# Altium PCB 6C-4L-1550um.PcbDoc
Units mm, origin at the board's own origin, x right, y up, seen from the top; angles counter-clockwise.
Board outline 54 x 72 mm, 4 copper layers (Top Layer, Mid-Layer 1, Mid-Layer 2, Bottom Layer), stack 1.536 mm thick; 78 components, 58 nets, 276 pads, 193 vias.
Unrouted connection lines stored in the file: 55.
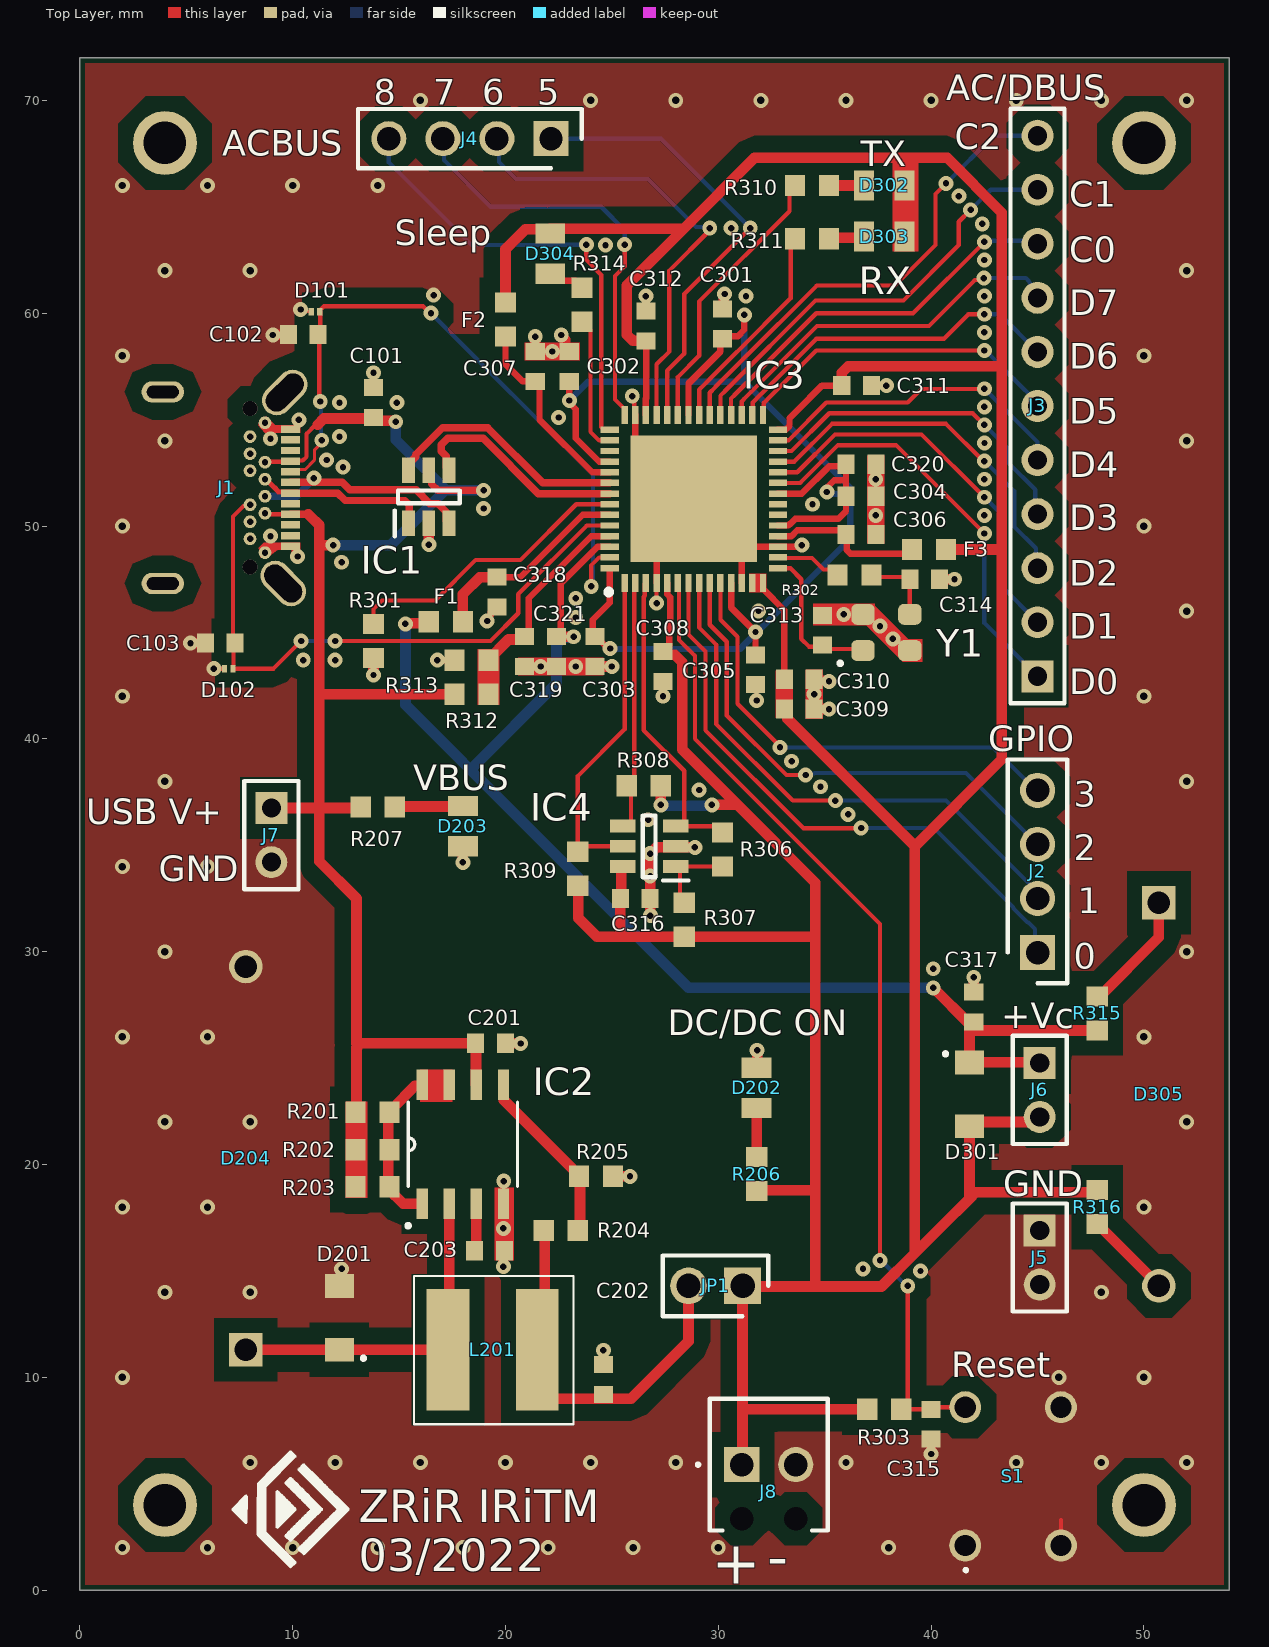
[diagram p0: Top Layer view]
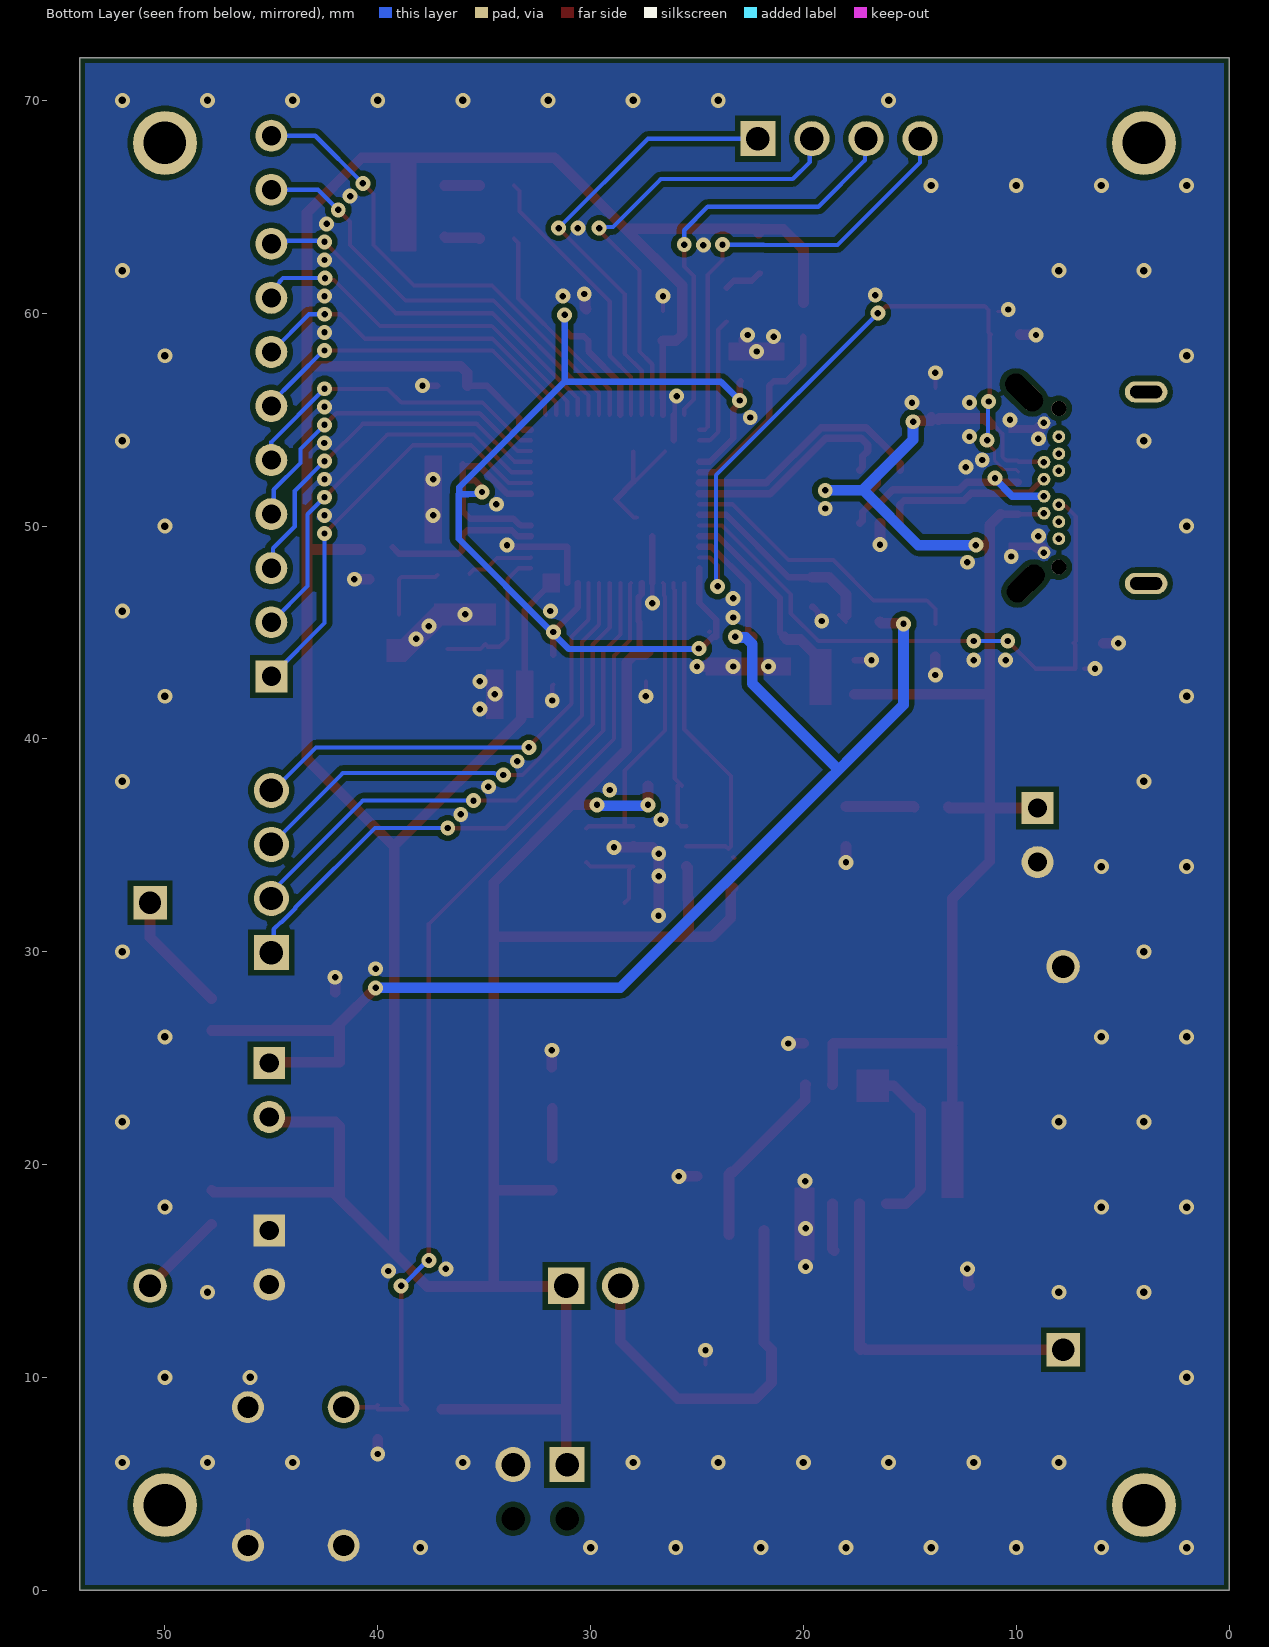
[diagram p1: Bottom Layer view, seen from below]
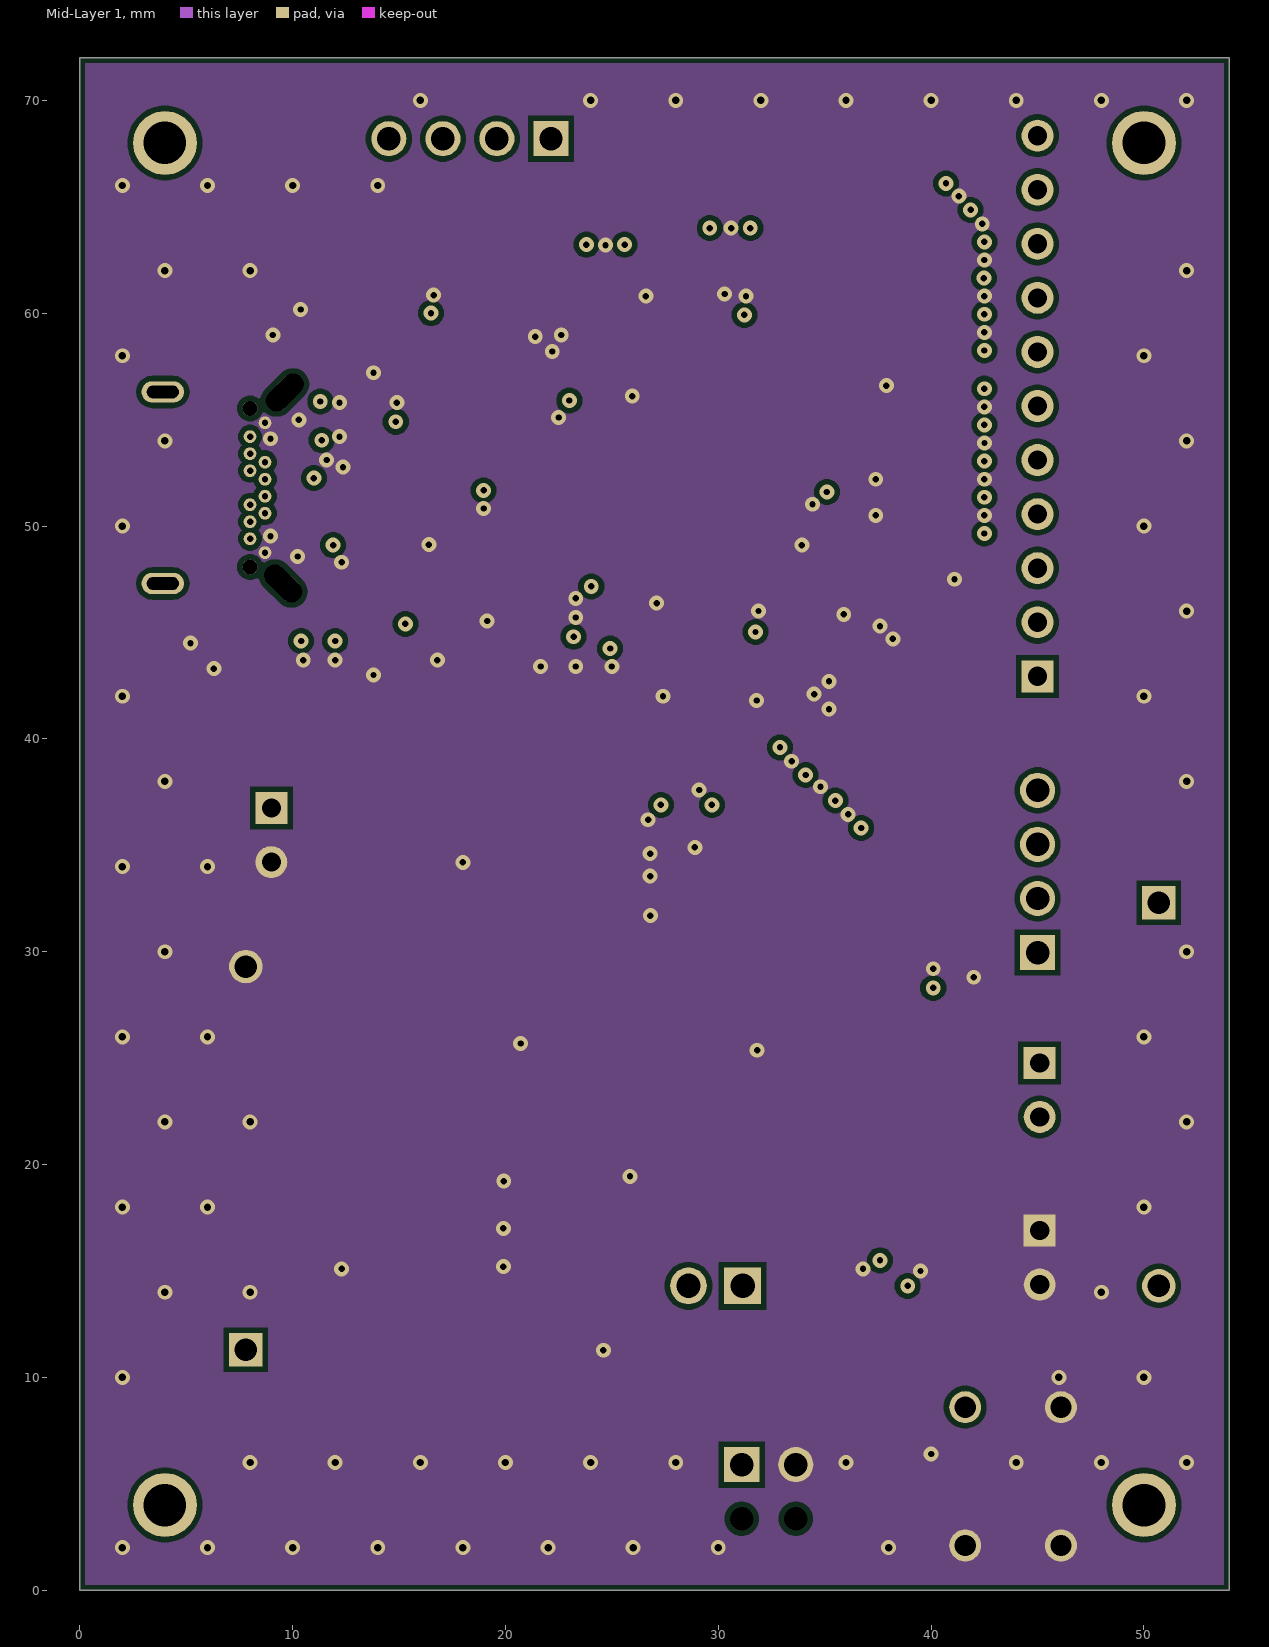
[diagram p2: Mid-Layer 1]
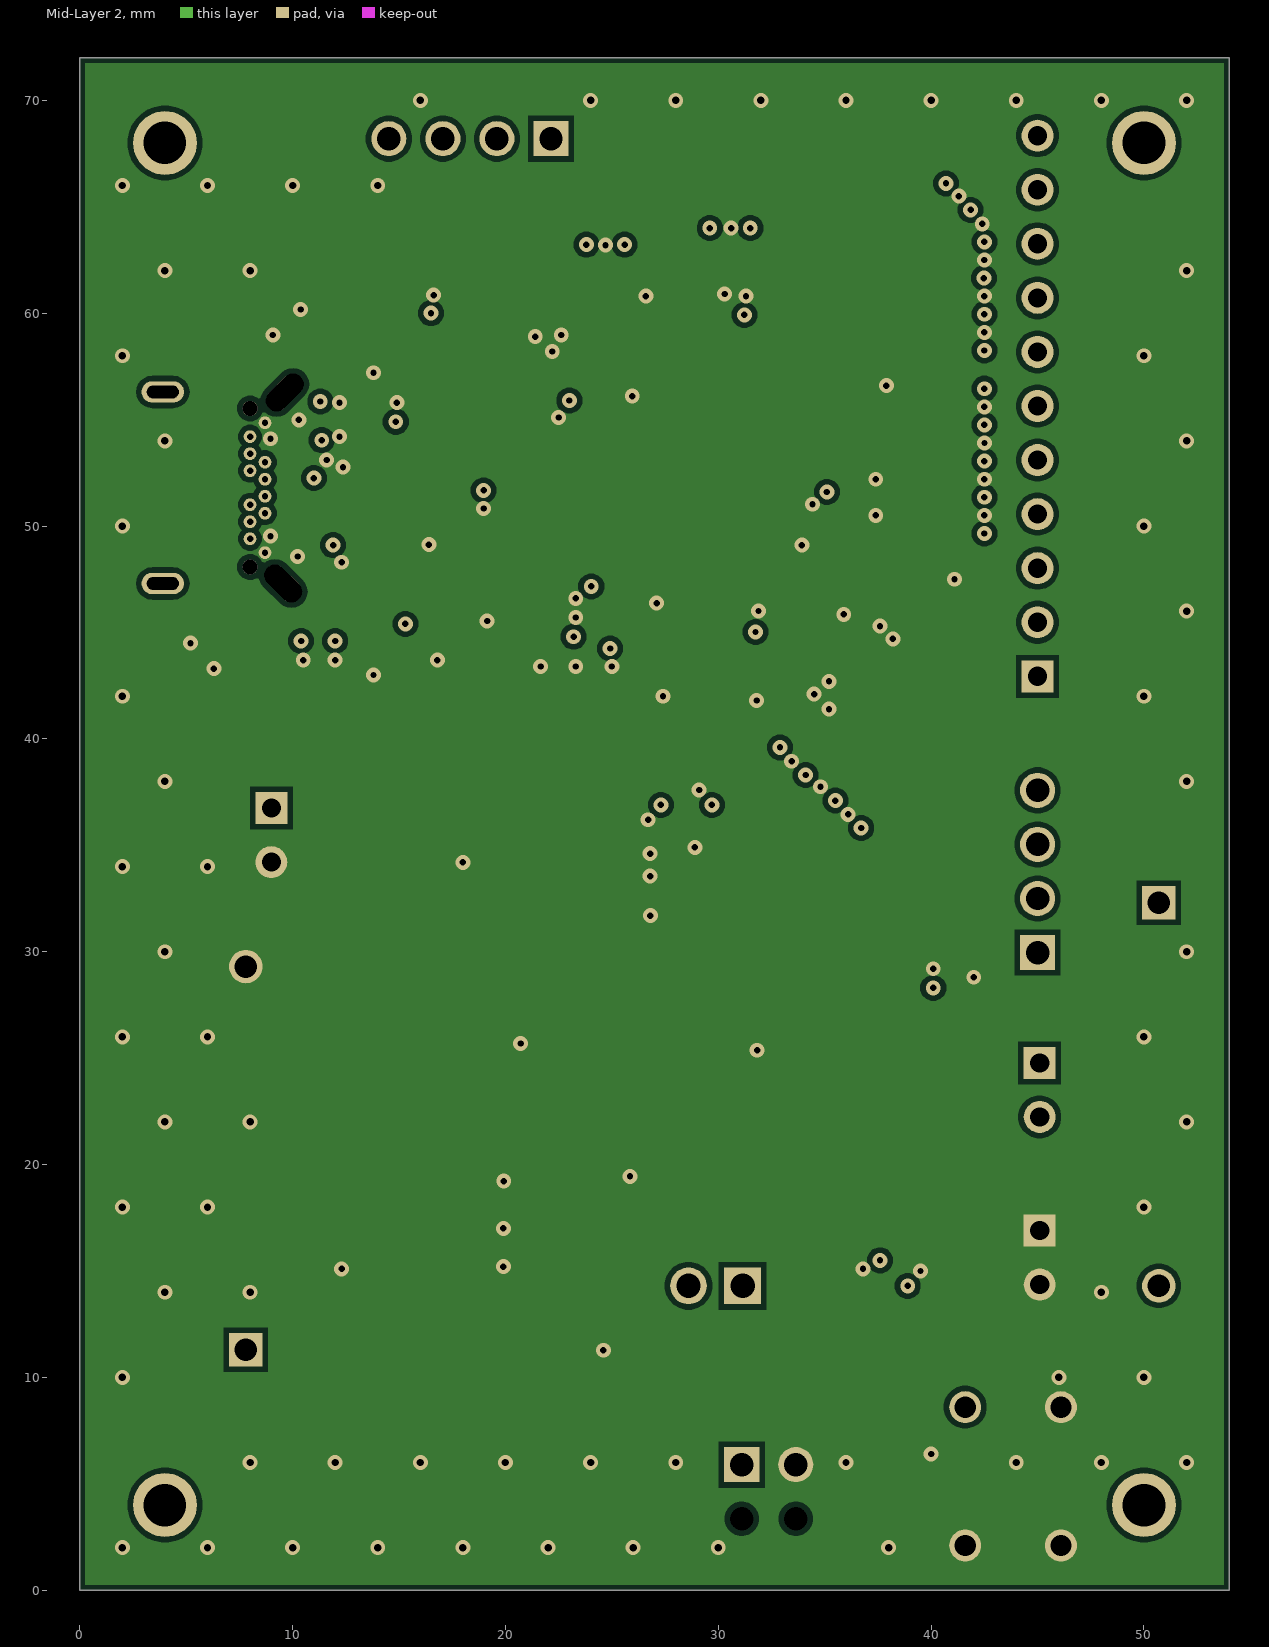
[diagram p3: Mid-Layer 2]

## Layer stack, top to bottom
Top Solder: solder mask 0.0102, Solder Resist, Dk 3.5
Top Layer: signal copper 0.018
Dielectric1: prepreg 0.36, FR-4, Dk 4.8
Mid-Layer 1: signal copper 0.035
Dielectric2: core 0.71, FR-4, Dk 4.8
Mid-Layer 2: signal copper 0.035
Dielectric3: prepreg 0.36, FR-4, Dk 4.8
Bottom Layer: signal copper 0.018
Bottom Solder: solder mask 0.0102, Solder Resist, Dk 3.5

## Board outline
0,0 54,0 54,72 0,72

## Design rules (kind name [scope] priority, off if disabled: settings)
BoardOutlineClearance [All] p1: gap=0.25 ignorepadtopadclearanceinfootprint=FALSE except(0: Arc-SplitContinuation Track-SplitContinuation SMDPad-SplitContinuation THPad-SplitContinuation Via-SplitContinuation Fill-SplitContinuation Poly-SplitContinuation Region-SplitContinuation Text-SplitContinuation)
Clearance Clearance_Poly_top [(InPolygon AND OnLayer('Top Layer'))] p1: gap=0.7 ignorepadtopadclearanceinfootprint=FALSE
Clearance Clearance_Poly [InPolygon] p2: gap=0.25 ignorepadtopadclearanceinfootprint=FALSE
Clearance Clearance-xPP-xTP-xTT [All] p3: gap=0.15 ignorepadtopadclearanceinfootprint=FALSE
ComponentClearance [All] p1: gap=0.25 collisioncheckmode=3 verticalgap=0.25 showdistances=FALSE
DiffPairsRouting [All] p1: maxlimit=0.2 minlimit=0.15 mostfreqgap=0.15 toplayer_minwidth=0.25 toplayer_maxwidth=0.4 toplayer_prefwidth=0.35 midlayer1_maxgap=0.15 midlayer1_minwidth=0.25 midlayer1_maxwidth=0.4 midlayer1_prefwidth=0.35 midlayer2_maxgap=0.15 midlayer2_minwidth=0.25 midlayer2_maxwidth=0.4 midlayer2_prefwidth=0.35 bottomlayer_minwidth=0.25 bottomlayer_maxwidth=0.4 bottomlayer_prefwidth=0.35 maxuncoupledlength=12.5
Height [All] p1: minheight=0 maxheight=25 prefheight=12.5
HoleSize HoleSize-PTH [All] p1: absolutevalues=TRUE maxlimit=2 minlimit=0.25 maxpercent=80.000 minpercent=20.000
HoleToHoleClearance [All] p1: gap=0.35 allowstackedmicrovias=TRUE
MinimumAnnularRing "Minimum IAR  >0.45mm" [((ObjectKind = 'Pad') OR (ObjectKind = 'Via')) And (Layer = 'MultiLayer') And (HoleDiameter > AsMM(0.45))] p1: minimumring=0.175 // minimum inner annular ring for pads > 0.45mm finished hole size
MinimumAnnularRing "Minimum IAR <=0.45mm" [((ObjectKind = 'Pad') OR (ObjectKind = 'Via')) And (Layer = 'MultiLayer') And (HoleDiameter <= AsMM(0.45))] p2: minimumring=0.175 // minimum inner annular ring for pads <= 0.45mm finished hole size
MinimumSolderMaskSliver [All] p1: minsoldermaskwidth=0.08
PlaneClearance PlaneClearance-IPI [All] p1: clearance=0.25
PlaneConnect [All] p1: planeconnectstyle=Relief reliefexpansion=0.175 reliefentries=4 reliefconductorwidth=0.2 reliefairgap=0.2
PolygonConnect PolygonConnect-xTW [All] p1: connectstyle=Direct reliefconductorwidth=0.2 reliefentries=4 polygonreliefangle="90 Angle" airgapwidth=0.2
RoutingCorners [All] p1: cornerstyle=45-Degree minsetback=2.5 maxsetback=2.5
RoutingVias "RoutingVias > 0.45mm" [(ObjectKind = 'Via') And (HoleDiameter > AsMM(0.45))] p1: holewidth=0.5 width=0.85 viastyle="Through Hole" minholewidth=0.5 minwidth=0.85 maxholewidth=0.9 maxwidth=1.25 // finishet hole size > 0.45mm
RoutingVias "RoutingVias <= 0.45mm" [(ObjectKind = 'Via') And (HoleDiameter <= AsMM(0.45))] p2: holewidth=0.3 width=0.65 viastyle="Through Hole" minholewidth=0.25 minwidth=0.6 maxholewidth=0.45 maxwidth=0.8 // finishet hole size <= 0.45mm
SilkToSilkClearance [All] p1: silktosilkclearance=0.2
SilkToSolderMaskClearance SilkscreenOverComponentPads [IsPad] p1: minsilkscreentomaskgap=0.2 clearancetoexposedcopper=TRUE
SolderMaskExpansion [All] p1: expansion=0 istentingtop=FALSE
UnRoutedNet [All] p1: checkbadconnections=TRUE
Width Width-xTW [All] p1: maxlimit=0.5 minlimit=0.15 preferedwidth=0.2
18 further rules are at their usual default settings.

## Classes and differential pairs
differential pair class USB_CONN: USB_CONN
component class Sheet2: C301 C302 C303 C304 C305 C306 C307 C308 C309 C310 C311 C312 C313 C314 C315 C316 C317 C318 C319 C320 C321 D301 D302 D303 D304 D305 F1 F2 F3 IC3 IC4 R301 R302 R303 R306 R307 R308 R309 R310 R311 R312 R313 R314 R315 R316 S1 Y1
component class Sheet1: C101 C102 C103 C201 C202 C203 D101 D102 D201 D202 D203 D204 IC1 IC2 J1 J2 J3 J4 J5 J6 J7 J8 JP1 L201 R201 R202 R203 R204 R205 R206 R207
differential pair USB: +USB_P -USB_N
differential pair USB_CONN: +USB_CONN_P -USB_CONN_N

## Components (designator, comment, footprint, x,y, rotation, side; value= is the part's Value field where it differs from the comment)
C101 "Cap Semi" 1608[0603] 13.8,55.8 r90 top value=100nF
C102 "Cap Semi" 1608[0603] 10.5,59 r0 top value=330pF
C103 "Cap Semi" 1608[0603] 6.6,44.5 r0 top value=330pF
C201 "Cap Semi" 1608[0603] 19.3,25.7 r180 top value=100uF
C202 "Cap Semi" 1608[0603] 24.6,9.9 r270 top value=470uF
C203 "Cap Semi" 1608[0603] 19.25,15.95 r180 top value=470pF
C301 "Cap Semi" 1608[0603] 30.2,59.5 r270 top value=100nF
C302 "Cap Semi" 1608[0603] 23,57.5 r270 top value=100nF
C303 "Cap Semi" 1608[0603] 24.2,44.1 r90 top value=100nF
C304 "Cap Semi" 1608[0603] 36.7,51.4 r180 top value=100nF
C305 "Cap Semi" 1608[0603] 31.75,43.25 r90 top value=100nF
C306 "Cap Semi" 1608[0603] 36.7,49.6 r180 top value=100nF
C307 "Cap Semi" 1608[0603] 21.4,57.5 r90 top value=100nF
C308 "Cap Semi" 1608[0603] 27.4,43.4 r90 top value=100nF
C309 "Cap Semi" 1608[0603] 33.8,41.4 r180 top value=100nF
C310 "Cap Semi" 1608[0603] 33.8,42.8 r180 top value=100nF
C311 "Cap Semi" 1608[0603] 36.5,56.6 r180 top value=100nF
C312 "Cap Semi" 1608[0603] 26.6,59.4 r270 top value=100nF
C313 "Cap Semi" 1608[0603] 34.9,45.1 r270 top value=18pF
C314 "Cap Semi" 1608[0603] 39.7,47.5 r180 top value=18pF
C315 "Cap Semi" 1608[0603] 40,7.8 r270 top value=100nF
C316 "Cap Semi" 1608[0603] 26.1,32.5 r0 top value=100nF
C317 "Cap Semi" 1608[0603] 42,27.4 r90 top value="100nF (DNM)"
C318 "Cap Semi" 1608[0603] 19.6,46.9 r90 top value=100nF
C319 "Cap Semi" 1608[0603] 20.9,44.1 r90 top value=33nF
C320 "Cap Semi" 1608[0603] 36.7,52.9 r180 top value=100nF
C321 "Cap Semi" 1608[0603] 22.4,44.1 r90 top value=100nF
D101 "TVS Diode" "PESD15VW1BCSF - TVS DIODE" 11.075,60.075 r180 top
D102 "TVS Diode" "PESD15VW1BCSF - TVS DIODE" 7,43.3 r0 top
D201 "1N5819HW1-7-F" SODFL3518X115N 12.2,12.8 r90 top
D202 "RED" LEDC2012X80N 31.8,23.6 r90 top
D203 "RED" LEDC2012X80N 18,35.9 r270 top
D204 "THT (DNM)" DIOAD1796W86L628D292 7.8,11.3 r90 top
D301 "1N5819HW1-7-F" SODFL3518X115N 41.8,23.3 r270 top
D302 "GREEN" LEDC2012X80N 37.8,66 r180 top
D303 "YELLOW" LEDC2012X80N 37.8,63.6 r180 top
D304 "BLUE" LEDC2012X80N 22.1,62.8 r270 top
D305 "THT (DNM)" DIOAD1796W86L628D292 50.7,32.3 r270 top
F1 "Ferryt 0603" RESC1608X55N 17.2,45.5 r180 top
F2 "Ferryt 0603" RESC1608X55N 20,59.7 r270 top
F3 "Ferryt 0603" RESC1608X55N 39.9,48.9 r180 top
IC1 "USBLC6-2SC6" SOT95P280X145-6N 16.4,51.375 r90 top
IC2 "MC34063ACD-TR" SOIC127P600X175-8N 18,20.95 r90 top
IC3 "FT232HPQ-TRAY" QFN50P800X800X90-57N-D 28.85,51.275 r90 top
IC4 "93LC66BT-E/OT" SOT95P280X145-6N 26.75,34.95 r180 top
J1 "UJ31-CH-G1-SMT-TR" "CUI_UJ31-CH-G1-SMT-TR - DUPLICATE" 9.905,54.55 r270 top
J2 "M20-9990446" HDRV4W64P0X254_1X4_1016X254X889P 45,29.96 r90 top
J3 "Header 11" HDR1X11 45,42.94 r90 top
J4 "M20-9990446" HDRV4W64P0X254_1X4_1016X254X889P 22.14,68.2 r180 top
J5 "Header 2" HDR1X2 45.1,16.9 r270 top
J6 "Header 2" HDR1X2 45.1,24.775 r270 top
J7 "Header 2" HDR1X2 9,36.75 r270 top
J8 "1725656" 1725656 31.1,5.9 r0 top
JP1 "5-146277-2" HDRV2W67P0X254_1X2_467X234X823P 31.14,14.3 r180 top
L201 "220uH" "242418 FPS" 19.4,11.3 r0 top
R201 "Res3" RESC1608X55N 13.75,22.45 r180 top value=1
R202 "Res3" RESC1608X55N 13.75,20.7 r180 top value=1
R203 "Res3" RESC1608X55N 13.75,18.95 r180 top value=1
R204 "Res3" RESC1608X55N 22.6,16.9 r0 top value=1.3K
R205 "Res3" RESC1608X55N 24.25,19.45 r180 top value=2.2K
R206 "Res3" RESC1608X55N 31.8,19.55 r90 top value=5K1
R207 "Res3" RESC1608X55N 14,36.8 r0 top value=5K1
R301 "Res3" RESC1608X55N 13.8,44.6 r90 top value=12K
R302 "Res3" RESC1608X55N 36.4,47.7 r0 top value=75
R303 "10K" RESC1608X55N 37.8,8.5 r180 top
R306 "2K(10K?)" RESC1608X55N 30.2,34.8 r90 top
R307 "10K" RESC1608X55N 28.4,31.5 r90 top
R308 "10K" RESC1608X55N 26.5,37.8 r180 top
R309 "10K" RESC1608X55N 23.4,33.9 r90 top
R310 "4.7K" RESC1608X55N 34.4,66 r0 top
R311 "4.7K" RESC1608X55N 34.4,63.5 r0 top
R312 "100K" RESC1608X55N 18.4,42.1 r180 top
R313 "15K" RESC1608X55N 18.4,43.7 r0 top
R314 "2.2K" RESC1608X55N 23.6,60.4 r90 top
R315 "0 (DNM)" RESC1608X55N 47.8,27.1 r270 top
R316 "0 (DNM)" RESC1608X55N 47.8,18 r90 top
S1 "SKHHAKA010" SKHHALA010 43.85,5.35 r90 top
Y1 "ABM8G-12.000MHZ-18-D2Y-T" OSCSC320X250X100N 37.9,45 r90 top

## Footprints (in the part's own frame and the unit in brackets; to place one, negate y for a bottom-side part, rotate by r counter-clockwise, add the part's x,y. Pads: shape width x height; smd on the part's side, far side on the other; paste and mask are expansions set on the pad)
1608[0603] [mm] "Chip Capacitor, Body 1.6x0.8mm, IPC High Density"
  rect 0.8x0.9 smd: 1(-0.7,0) 2(0.7,0)
  body extent -0.87,-0.48 0.87,0.48, height 1.3
"242418 FPS" [mm]
  rect 2x5.7 smd: 1(-2.1,0) 2(2.1,0)
  silkscreen extent -3.7,-3.5 3.8,3.47
1725656 [mm]
  rect 1.65x1.65 hole 1.1: 1(0,0)
  round 1.65 hole 1.1: 2(2.54,0)
  round 0.55 hole 1.1 unplated: MH1(0,-2.54) MH2(2.54,-2.54)
  silkscreen extent -2.1,-3.1 4.04,3.1, body extent -1.5,-3.1 4.04,3.1, height 9
"CUI_UJ31-CH-G1-SMT-TR - DUPLICATE" [mm]
  rect 0.35x0.89 smd: A1(0,0) A2(0.5,0) A3(1,0) A4(1.5,0) A5(2,0) A6(2.5,0) A7(3,0) A8(3.5,0) A9(4,0) A10(4.5,0) A11(5,0) A12(5.5,0)
  round 0.6 hole 0.3: B1(5.8,-1.205) B2(5.15,-1.905) B3(4.35,-1.905) B4(3.95,-1.205) B5(3.55,-1.905) B6(3.15,-1.205) B7(2.35,-1.205) B8(1.95,-1.905) B9(1.55,-1.205) B10(1.15,-1.905) B11(0.35,-1.905) B12(-0.3,-1.205)
  oval 1x2 hole 0.6 slot 1.5 at 90 deg: SH1(-1.75,-6.005) SH4(7.25,-6.005)
  oval 2.45x1.4 / inner oval 2x1 / far side oval 2x1 hole 1 slot 2.1 at 135 deg rot 135: SH3(-1.725,-0.275)
  oval 2.45x1.4 / inner oval 2x1 / far side oval 2x1 hole 1 slot 2.1 at 45 deg rot 45: SH3(7.25,-0.35)
  round 0.7 hole 0.7 unplated: ""(-0.975,-1.905) ""(6.475,-1.905)
DIOAD1796W86L628D292 [mm]
  rect 1.575x1.575 hole 1.05: 1(0,0)
  round 1.575 hole 1.05: 2(18,0)
  body extent -0.43,-1.52 18.4,1.52, height 3.04
HDR1X2 [mm] "Connector; Header; 2 Position"
  rect 1.5x1.5 hole 0.9: 1(0,0)
  round 1.5 hole 0.9: 2(2.54,0)
  silkscreen extent -1.27,-1.27 3.81,1.27
HDR1X11 [mm] "Connector; Header; 11 Position"
  rect 1.5x1.5 hole 0.9: 1(0,0)
  round 1.5 hole 0.9: 2(2.54,0) 3(5.08,0) 4(7.62,0) 5(10.16,0) 6(12.7,0) 7(15.24,0) 8(17.78,0) 9(20.32,0) 10(22.86,0) 11(25.4,0)
  silkscreen extent -1.27,-1.27 26.67,1.27
HDRV2W67P0X254_1X2_467X234X823P [mm]
  rect 1.725x1.725 hole 1.15: 1(0,0)
  round 1.725 hole 1.15: 2(2.54,0)
  silkscreen extent -1.21,-1.43 3.75,1.43, body extent -1.07,-1.17 3.61,1.17, height 8.12
HDRV4W64P0X254_1X4_1016X254X889P [mm]
  rect 1.65x1.65 hole 1.1: 1(0,0)
  round 1.65 hole 1.1: 2(2.54,0) 3(5.08,0) 4(7.62,0)
  silkscreen extent -1.45,-1.4 9.07,1.4, body extent -1.27,-1.27 8.89,1.27, height 8.89
LEDC2012X80N [mm]
  rect 0.95x1.4 smd: 1(-0.95,0) 2(0.95,0)
  body extent -1,-0.63 1,0.63, height 0.8
OSCSC320X250X100N [mm]
  rrect53% 0.98x1.1 smd: 1(-0.85,1.1) 2(-0.85,-1.1) 3(0.85,-1.1) 4(0.85,1.1)
  silkscreen extent -1.54,2.09 -1.36,2.26
"PESD15VW1BCSF - TVS DIODE" [mm]
  rect 0.25x0.35 smd: 1(-0.2,0) 2(0.2,0)
QFN50P800X800X90-57N-D [mm]
  rect 0.85x0.3 smd: 1(-3.95,3.25) 2(-3.95,2.75) 3(-3.95,2.25) 4(-3.95,1.75) 5(-3.95,1.25) 6(-3.95,0.75) 7(-3.95,0.25) 8(-3.95,-0.25) 9(-3.95,-0.75) 10(-3.95,-1.25) 11(-3.95,-1.75) 12(-3.95,-2.25) 13(-3.95,-2.75) 14(-3.95,-3.25) 29(3.95,-3.25) 30(3.95,-2.75) 31(3.95,-2.25) 32(3.95,-1.75) 33(3.95,-1.25) 34(3.95,-0.75) 35(3.95,-0.25) 36(3.95,0.25) 37(3.95,0.75) 38(3.95,1.25) 39(3.95,1.75) 40(3.95,2.25) 41(3.95,2.75) 42(3.95,3.25)
  rect 0.3x0.85 smd: 15(-3.25,-3.95) 16(-2.75,-3.95) 17(-2.25,-3.95) 18(-1.75,-3.95) 19(-1.25,-3.95) 20(-0.75,-3.95) 21(-0.25,-3.95) 22(0.25,-3.95) 23(0.75,-3.95) 24(1.25,-3.95) 25(1.75,-3.95) 26(2.25,-3.95) 27(2.75,-3.95) 28(3.25,-3.95) 43(3.25,3.95) 44(2.75,3.95) 45(2.25,3.95) 46(1.75,3.95) 47(1.25,3.95) 48(0.75,3.95) 49(0.25,3.95) 50(-0.25,3.95) 51(-0.75,3.95) 52(-1.25,3.95) 53(-1.75,3.95) 54(-2.25,3.95) 55(-2.75,3.95) 56(-3.25,3.95)
  rect 5.95x5.95 smd: 57(0,0)
  silkscreen extent -4.5,3.87 -4.25,4.12, body extent -4.05,-4.05 4.05,4.05, height 0.9
RESC1608X55N [mm]
  rect 0.95x1 smd: 1(-0.8,0) 2(0.8,0)
  body extent -0.8,-0.4 0.8,0.4, height 0.55
SKHHALA010 [mm]
  round 1.5 hole 1: 1(-3.25,2.25) 2(3.25,2.25) 3(-3.25,-2.25) 4(3.25,-2.25)
  silkscreen extent -4.46,2.17 -4.35,2.27, body extent -3.95,-3.1 3.95,3.1, height 4.3
SODFL3518X115N [mm]
  rect 1.12x1.37 smd: 1(-1.5,0) 2(1.5,0)
  silkscreen extent -1.97,-1.2 -1.83,-1.05, body extent -1.75,-0.9 1.75,0.9, height 1.15
SOIC127P600X175-8N [mil]
  rect 56x21 smd: 1(-110,75) 2(-110,25) 3(-110,-25) 4(-110,-75) 5(110,-75) 6(110,-25) 7(110,25) 8(110,75)
  silkscreen extent -154,-101 78,104
SOT95P280X145-6N [mm]
  rect 1.2x0.6 smd: 1(-1.25,0.95) 2(-1.25,0) 3(-1.25,-0.95) 4(1.25,-0.95) 5(1.25,0) 6(1.25,0.95)
  silkscreen extent -1.85,-1.45 0.3,1.6, body extent -1.4,-1.45 1.4,1.45, height 1.45

## Part data
C101 C102 C103 C201 C202 C203 C301 C302 C303 C304 C305 C306 C307 C308 C309 C310 C311 C312 C313 C314 C315 C316 C317 C318 C319 C320 C321: "Capacitor (Semiconductor SIM Model)", LatestRevisionDate=29-May-2009, LatestRevisionNote="IPC-7351 Footprint Added.", PackageDescription="Chip Capacitor", PackageReference=C1206, Published=8-Jun-2000, Publisher="Altium Limited"
D101 D102: library part PESD15VW1BCSFYL, "PESD15VW1BCSFYL - Extremely low capacitance bidirectional ESD protection diode"
D201 D301: "Schottky Diode", Manufacturer_Name="Diodes Inc.", Mouser Part Number=621-1N5819HW1-7-F, Arrow Part Number=1N5819HW1-7-F, Arrow Price/Stock=https://www.arrow.com/en/products/1n5819hw1-7-f/diodes-incorporated?region=nac, Datasheet Link=https://www.diodes.com/assets/Datasheets/1N5819HW1.pdf, Height=1.15mm, Manufacturer_Part_Number=1N5819HW1-7-F, Mouser Price/Stock=https://www.mouser.co.uk/ProductDetail/Diodes-Incorporated/1N5819HW1-7-F?qs=60RJRzIpcl9ACQG7Zn63jQ%3D%3D
D202 D203 D302 D303 D304: library part LED2, "Typical RED, GREEN, YELLOW, AMBER GaAs LED", LatestRevisionDate=17-Jul-2002, LatestRevisionNote="Re-released for DXP Platform.", PackageDescription="SM LED; 2 Flat Leads", PackageReference=3.2X1.6X1.1, PackageVersion=Feb-2002, Published=8-Jun-2000, Publisher="Altium Limited"
D204 D305: library part 1N5819HW1-7-F, "Schottky Diode", Manufacturer_Name="Diodes Inc.", Mouser Part Number=621-1N5819HW1-7-F, Arrow Part Number=1N5819HW1-7-F, Arrow Price/Stock=https://www.arrow.com/en/products/1n5819hw1-7-f/diodes-incorporated?region=nac, Datasheet Link=https://www.diodes.com/assets/Datasheets/1N5819HW1.pdf, Height=1.15mm, Manufacturer_Part_Number=1N5819HW1-7-F, Mouser Price/Stock=https://www.mouser.co.uk/ProductDetail/Diodes-Incorporated/1N5819HW1-7-F?qs=60RJRzIpcl9ACQG7Zn63jQ%3D%3D
F1 F2 F3 R303 R306 R307 R308 R309 R310 R311 R312 R313 R314 R315 R316: library part "Resistor 0603", "Small resistor symbol 0603", Case Code (Imperial)=0402, Case Code (Metric)=1005, Manufacturer=Panasonic, Manufacturer Part Number=ERJ-2GEJ510X, Max Operating Temperature=155°C, Max Power Dissipation=100mW, Min Operating Temperature=-55°C, Package Quantity=1, Resistance=51R, Resistance Tolerance=5%, Resistor Type="Thick Film", Supplier Part Number 1=667-ERJ-2GEJ510X, Temperature Coefficient=200ppm/°C, Voltage Rating=50V, Case/Package=0402, Category="Chip SMD Resistors", ComponentLink1Description=https://datasheet.ciiva.com/34303/1986983-34303549.pdf?src-supplier=Jameco, ComponentLink1URL=https://datasheet.ciiva.com/34303/1986983-34303549.pdf?src-supplier=Jameco, ComponentLink2Description=https://datasheet.ciiva.com/30130/4aoa0000ce1-30130213.pdf?src-supplier=Onlinecomponents.com, ComponentLink2URL=https://datasheet.ciiva.com/30130/4aoa0000ce1-30130213.pdf?src-supplier=Onlinecomponents.com, ComponentLink3Description=https://datasheet.ciiva.com/16522/aoa0000ce1-16522823.pdf?src-supplier=Avnet+Asia, ComponentLink3URL=https://datasheet.ciiva.com/16522/aoa0000ce1-16522823.pdf?src-supplier=Avnet+Asia, ComponentLink4Description=https://datasheet.ciiva.com/16784/70260739-16784088.pdf?src-supplier=Allied+Electronics, ComponentLink4URL=https://datasheet.ciiva.com/16784/70260739-16784088.pdf?src-supplier=Allied+Electronics, ComponentLink5Description=https://datasheet.ciiva.com/43460/1500035-43460360.pdf?src-supplier=Farnell, ComponentLink5URL=https://datasheet.ciiva.com/43460/1500035-43460360.pdf?src-supplier=Farnell, ComponentLink6Description=https://datasheet.ciiva.com/9189/aoa0000ce1-9189069.pdf?src-supplier=Avnet, ComponentLink6URL=https://datasheet.ciiva.com/9189/aoa0000ce1-9189069.pdf?src-supplier=Avnet, ComponentLink7Description=https://datasheet.ciiva.com/46386/1500035-46386749.pdf?src-supplier=Element14, ComponentLink7URL=https://datasheet.ciiva.com/46386/1500035-46386749.pdf?src-supplier=Element14, ComponentLink8Description=https://datasheet.ciiva.com/28565/1678796-28565007.pdf?src-supplier=Element14, ComponentLink8URL=https://datasheet.ciiva.com/28565/1678796-28565007.pdf?src-supplier=Element14, Construction=Rectangular, Contact Plating=Tin, Depth=0.5mm, Features="Automotive AEC-Q200", Height=0.35mm, Lead Free="Lead Free", Length=1mm, Military Standard=Not, Mount="Surface Mount", Number of Terminations=2, Packaging="Tape and Reel", Power Rating=100mW, Pricing 1="1=0,10000, 10=0,01900, 50=0,01900, 100=0,00800, 1000=0,00300, 10000=0,00300 (USD)", REACH SVHC="No SVHC", RoHS=Yes, RoHS Compliant=Yes, Series=ERJ, Size Code=0402, Stock 1=49112, Supplier 1=Mouser, Technology="THICK FILM", Termination=SMD/SMT, Tolerance=5%, Voltage Rating (DC)=50V, Width=0.02inch
IC1: "Integrated Circuit", Manufacturer_Name=STMicroelectronics, Mouser Part Number=511-USBLC6-2SC6, Arrow Part Number=USBLC6-2SC6, Arrow Price/Stock=https://www.arrow.com/en/products/usblc6-2sc6/stmicroelectronics?region=nac, Datasheet Link=http://www.st.com/st-web-ui/static/active/en/resource/technical/document/datasheet/CD00050750.pdf, Height=1.45mm, Manufacturer_Part_Number=USBLC6-2SC6, Mouser Price/Stock=https://www.mouser.co.uk/ProductDetail/STMicroelectronics/USBLC6-2SC6?qs=po45yt2pPpu%2FhNIlwQdTlg%3D%3D
IC2: "Integrated Circuit", Manufacturer_Name=STMicroelectronics, Mouser Part Number=511-MC34063ACD-TR, Arrow Part Number=MC34063ACD-TR, Arrow Price/Stock=https://www.arrow.com/en/products/mc34063acd-tr/stmicroelectronics?region=nac, Datasheet Link=http://www.st.com/st-web-ui/static/active/en/resource/technical/document/datasheet/CD00001232.pdf, Height=1.75mm, Manufacturer_Part_Number=MC34063ACD-TR, Mouser Price/Stock=https://www.mouser.co.uk/ProductDetail/STMicroelectronics/MC34063ACD-TR?qs=zDcCjb1ShEnlEhOFqqejBw%3D%3D
IC3: "Integrated Circuit", Manufacturer_Name="FTDI Chip", Mouser Part Number=895-FT232HPQ-TRAY, Datasheet Link=https://www.ftdichip.com/Support/Documents/DataSheets/ICs/DS_FT233HP.pdf, Height=0.9mm, Manufacturer_Part_Number=FT232HPQ-TRAY, Mouser Price/Stock=https://www.mouser.co.uk/ProductDetail/FTDI/FT232HPQ-TRAY?qs=DRkmTr78QAQOR9QDUJT%2FRg%3D%3D
IC4: "Microwire Compatible Serial EEPROM", Package=None, Availability=Unavailable, MP=93LC66BT-E/OT, Price=None
J1: "Type C, USB 3.1 Gen 2, 5 A, Right Angle, Surface Mount _SMT_ , USB Receptacle", Package=None, Availability=Unavailable, CUI_purchase_URL=https://www.cuidevices.com/product/interconnect/connectors/usb-connectors/uj31-ch-g1-smt-tr?utm_source=snapeda.com&utm_medium=referral&utm_campaign=snapedaBOM, MF="CUI Devices", MP=UJ31-CH-G1-SMT-TR, Price=None, SnapEDA_Link=https://www.snapeda.com/parts/UJ31-CH-G1-SMT-TR/CUI%20Devices/view-part/2754415/?ref=snap
J2 J4: "Connector", Manufacturer_Name=Harwin, Mouser Part Number=855-M20-9990446, Datasheet Link=https://www.harwin.com/products/M20-9990446/, Height=8.89mm, Manufacturer_Part_Number=M20-9990446, Mouser Price/Stock=https://www.mouser.co.uk/ProductDetail/Harwin/M20-9990446?qs=ulE8k0yEMYaW%252BOM7jiG6%252Bw%3D%3D
J3: "Header, 11-Pin", LatestRevisionDate=17-Jul-2002, LatestRevisionNote="Re-released for DXP Platform.", Publisher="Altium Limited"
J5 J6 J7: "Header, 2-Pin", LatestRevisionDate=17-Jul-2002, LatestRevisionNote="Re-released for DXP Platform.", Publisher="Altium Limited"
J8: "Screw terminal", Manufacturer_Name="Phoenix Contact", Mouser Part Number=651-1725656, Arrow Part Number=1725656, Arrow Price/Stock=https://www.arrow.com/en/products/1725656/phoenix-contact?region=nac, Datasheet Link=https://www.phoenixcontact.com/online/portal/us/?uri=pxc-oc-itemdetail:pid=1725656&library=usen&pcck=P-11-01-05&tab=1&selectedCategory=ALL, Height=8.65mm, Manufacturer_Part_Number=1725656, Mouser Price/Stock=https://www.mouser.co.uk/ProductDetail/Phoenix-Contact/1725656?qs=Ul7CXFMnlWWQeccayYbRmw%3D%3D
JP1: "Connector", Manufacturer_Name="TE Connectivity", Mouser Part Number=571-5-146277-2, Arrow Part Number=5-146277-2, Arrow Price/Stock=https://www.arrow.com/en/products/5-146277-2/te-connectivity, Datasheet Link=https://www.te.com/commerce/DocumentDelivery/DDEController?Action=srchrtrv&DocNm=146277&DocType=Customer+Drawing&DocLang=English, Height=8.23mm, Manufacturer_Part_Number=5-146277-2, Mouser Price/Stock=https://www.mouser.co.uk/ProductDetail/TE-Connectivity/5-146277-2/?qs=bwpFY26eRVdSYoepUea0uA%3D%3D
L201: library part 242418FPS-221M-01, "Inductor 220uH, tolerance=20%, max. current=0.5A, DCR max. = 1104 mOhm"
R201 R202 R203 R204 R205 R206 R207 R301 R302: "Resistor", LatestRevisionDate=29-May-2009, LatestRevisionNote="IPC-7351 Footprint Added.", PackageDescription="Chip Resistor", PackageReference=J1-0603, Published=8-Jun-2000, Publisher="Altium Limited"
S1: "Switch", Manufacturer_Name=ALPS, Mouser Part Number=688-SKHHAK, Arrow Part Number=SKHHAKA010, Arrow Price/Stock=https://www.arrow.com/en/products/skhhaka010/alps-electric?region=nac, Datasheet Link=http://www.alps.com/prod/info/E/HTML/Tact/SnapIn/SKHH/SKHHAKA010.html, Manufacturer_Part_Number=SKHHAKA010, Mouser Price/Stock=https://www.mouser.co.uk/ProductDetail/ALPS/SKHHAKA010?qs=seHrhfPpLDyPUsCTaeDTPQ%3D%3D
Y1: "12MHz Â±20ppm Crystal 18pF 120 Ohms 4-SMD, No Lead", Package="SMD-4 Abracon", Digi-Key_Part_Number=535-10261-1-ND, Digi-Key_Purchase_URL=https://www.digikey.com/product-detail/en/abracon-llc/ABM8G-12.000MHZ-18-D2Y-T/535-10261-1-ND/2218074?utm_source=snapeda&utm_medium=aggregator&utm_campaign=symbol, MF=Abracon, MP=ABM8G-12.000MHZ-18-D2Y-T, SnapEDA_Link=https://www.snapeda.com/parts/ABM8G-12.000MHZ-18-D2Y-T/Abracon%20LLC/view-part/419259/?ref=snap

## Free pads (board coordinates)
  round 3 hole 2: 2(4,4) 2(4,68) 2(50,4) 2(50,68)

## Via types
v1: diameter 0.7, hole 0.3, Top Layer to Bottom Layer, tented both sides, 127 vias
v2: diameter 0.7/0.7/0.7/0.7 (per signal layer), hole 0.35, Top Layer to Bottom Layer, 66 vias

## Nets (pads, with @x,y where several pads share a name; then routed paths per layer and width w, separated by ;. In a path a pad name is that pad's centre, name@x,y a point inside that pad or via, vN(x,y) a via of type N, cw(c..) or ccw(c..) an arc to the next point about the centre after c; other vN are vias at no path point)
3.3V: C317.1 C321.2 D301.1 F1.2 IC3.54 J6.1 R315.2 | length 63.9
  Top Layer w0.3: C321.2 22.6,45 22.6,47.3 24.325,49.025 IC3.54
  Top Layer w0.5: v1(15.3,45.4) 15.338,45.438 16.338,45.438 F1.2 ; C321.2 v1(23.2,44.8) ; v1(40.1,28.3) C317.1@41.8,26.6 ; J6.1 45.075,24.8 D301.1 C317.1@41.8,26.6 ; R315.2 42.1,26.3 C317.1@41.8,26.6
  Bottom Layer w0.5: v1(15.3,45.4) 15.3,41.6 17.8,39.1 18.25,38.65 ; v1(23.2,44.8) 23.162,44.762 22.703,44.762 22.4,44.459 22.4,42.6 18.45,38.65 18.25,38.65 ; v1(40.1,28.3) 28.6,28.3 18.95,37.95 18.25,38.65
3.45V: C308.2 C309.2 C310.2 C311.2 C312.2 C316.1 D301.2 D302.1 D303.1 D304.1 F2.1 F3.1 IC3.5 IC3.13 IC3.14 IC3.28 IC3.40 IC4.6 J6.2 J8.1 JP1.1 R206.1 R303.2 R307.1 R308.1 R309.1 R316.2 | length 218.6
  Top Layer w0.2: IC3.40 IC3.40@26.641,55.266 ; IC3.14@32.1,47.188 IC3.14 ; C310.2@33,42.9 C310.2
  Top Layer w0.3: IC3.40 26.6,55.992 26.608,56 C312.2@26.608,58.7 ; C308.2@27.3,44.1 C308.2 27.45,44.1 27.7,44.35 27.7,45.498 27.75,45.548 27.75,46.646 27.6,46.796 IC3.5 ; IC3.14@32.1,47.188 32.1,47.05 33.1,46.05 C310.2 ; IC3.28 33.169,54.525 33.345,54.701 33.345,55.07 33.698,55.423 34.875,56.6 C311.2
  Top Layer w0.5: F2.1 20,63 20.943,63.943 21.907,63.943 D304.1 ; D304.1@22.074,63.943 22.1,63.969 28.369,63.969 ; R309.1@23.3,33 23.418,32.882 23.418,31.582 24.3,30.7 25.4,30.7 ; IC4.6 25.487,34 25.437,33.95 25.437,32.463 C316.1 25.4,30.7 ; C312.2 25.993,58.7 25.7,58.993 25.7,61.3 28.369,63.969 ; C308.2@27.3,44.1 27.45,43.95 27.95,43.95 28.3,43.6 28.3,39.5 30.9,36.9 ; v1(27.3,36.9) R308.1 ; v1(29.7,36.9) 30.9,36.9 ; J8.1 31.14,5.94 31.14,8.4 ; JP1.1 31.14,8.4 ; JP1.1@31.8,14.3 31.831,14.269 34.556,14.269 ; R206.1@31.8,18.8 34.556,18.8 ; C309.2@33.156,41.369 33.25,41.275 33.25,40.95 39.243,34.957 43.325,39.039 43.325,48.9 ; 34.556,27.6 34.556,18.8 ; 34.556,27.669 34.556,30.8 ; C311.2 35.8,57.2 36.1,57.5 43.325,57.5 ; R303.2 31.24,8.5 31.14,8.4 ; D302.1 38.75,66.225 D302.1@38.975,66.45 ; 39.225,34.975 39.225,15.825 ; F3.1@40.8,48.9 43.325,48.9 ; J6.2 44.829,22.235 44.594,22 42,22 D301.2 41.8,18.4 ; R316.2 47.7,18.7 42.1,18.7 41.8,18.4 ; 25.4,30.7 R307.1 34.456,30.7 34.556,30.8 ; 28.369,63.969 31.7,67.3 40.75,67.3 43.325,64.725 43.325,57.5 ; 30.9,36.9 34.556,33.244 34.556,30.8 ; 34.556,14.269 37.669,14.269 39.225,15.825 ; 34.556,14.269 34.556,18.8 ; 39.225,15.825 40.5,17.1 41.8,18.4 ; 43.325,48.9 43.325,55.462 43.325,57.5
  Bottom Layer w0.5: v1(27.3,36.9) 27.354,36.9 27.404,36.85 v1@29.411,36.85
ACBUS0: IC3.32 J3.9 | length 18.3
  Top Layer w0.2: IC3.32 30.6,55.991 30.75,56.141 30.75,56.147 34.603,60 39.15,60 v1(42.5,63.35)
  Bottom Layer w0.2: v1(42.5,63.35) 42.55,63.4 44.86,63.4 J3.9
ACBUS1: IC3.33 J3.10 | length 20.5
  Top Layer w0.2: IC3.33 30.1,56.127 30.3,56.327 30.3,56.333 34.567,60.6 38.7,60.6 41.3,63.2 41.3,64.3 41.853,64.853 v1(41.856,64.853)
  Bottom Layer w0.2: v1(41.856,64.853) 42.803,65.8 J3.10
ACBUS2: IC3.34 J3.11 | length 22.9
  Top Layer w0.2: IC3.34 29.6,56.264 29.85,56.514 29.85,56.52 31.08,57.75 34.63,61.3 38.3,61.3 40.2,63.2 40.2,64.8 40.2,65.6 v1(40.7,66.1)
  Bottom Layer w0.2: v1(40.7,66.1) 42.94,68.34 J3.11
ACBUS3: IC3.35 R311.1 | length 10.1
  Top Layer w0.2: IC3.35 29.1,56.4 29.4,56.7 29.4,56.706 30.894,58.2 30.9,58.2 33.4,60.7 33.4,63.3 R311.1
ACBUS4: IC3.37 R310.1 | length 13.1
  Top Layer w0.2: IC3.37 28.1,57 29.1,58 29.1,60.549 33.344,64.793 33.344,65.744 R310.1
ACBUS5: IC3.38 J4.1 | length 21.5
  Top Layer w0.2: IC3.38 27.6,57.3 28.4,58.1 28.4,60.897 v1(31.503,64)
  Bottom Layer w0.2: J4.1 27.303,68.2 v1(31.503,64)
ACBUS6: IC3.39 J4.2 | length 22.1
  Top Layer w0.2: IC3.39 27.1,55.588 27.101,55.589 27.101,57.601 27.7,58.2 27.7,62 29.6,63.9 v1(29.6,64)
  Bottom Layer w0.2: J4.2 19.699,68.101 19.699,67.101 20.5,66.3 26.7,66.3 28.95,64.05 29.55,64.05 v1(29.6,64)
ACBUS7: IC3.42 J4.3 | length 19.9
  Top Layer w0.2: IC3.42 25.6,55.5 25.15,55.95 25.15,61.75 25.6,62.2 v1(25.6,63.219)
  Bottom Layer w0.2: J4.3 17.108,68.152 17.108,67.192 19.3,65 24.5,65 25.6,63.9 v1(25.6,63.219)
ACBUS8: IC3.43 J4.4 | length 21.3
  Top Layer w0.2: v1(23.8,63.219) 23.8,62.5 24.5,61.8 24.5,54.65 24.625,54.525 IC3.43
  Bottom Layer w0.2: J4.4 14.52,67.08 18.4,63.2 21.842,63.2 21.862,63.219 v1(23.8,63.219)
ACBUS9: IC3.44 R314.1 | length 6.4
  Top Layer w0.2: R314.1 23.625,59.6 24,59.225 24,54.426 24.401,54.025 IC3.44
ADBUS0: IC3.23 J3.1 | length 19.9
  Top Layer w0.2: IC3.23 33.845,52.025 35.62,53.8 38.35,53.8 v1(42.5,49.65)
  Bottom Layer w0.2: v1(42.5,49.65) 42.5,45.44 J3.1
ADBUS1: IC3.24 J3.2 | length 18.6
  Top Layer w0.2: IC3.24 33.708,52.525 35.483,54.3 39.55,54.3 v1(42.5,51.35)
  Bottom Layer w0.2: v1(42.5,51.35) 43.3,50.55 43.3,47.18 J3.2
ADBUS2: IC3.25 J3.3 | length 17.2
  Top Layer w0.2: IC3.25 33.572,53.025 35.347,54.8 40.7,54.8 42.45,53.05 v1(42.5,53.05)
  Bottom Layer w0.2: v1(42.5,53.05) 43.9,51.65 43.9,49.977 44.924,48.953 44.924,48.096 J3.3
ADBUS3: IC3.26 J3.4 | length 15.9
  Top Layer w0.2: IC3.26 33.436,53.525 35.211,55.3 41.95,55.3 v1(42.5,54.75)
  Bottom Layer w0.2: v1(42.5,54.75) 42.508,54.75 43.634,53.625 43.634,52.966 44.89,51.71 44.89,50.67 J3.4
ADBUS4: IC3.27 J3.5 | length 15.1
  Top Layer w0.2: IC3.27 33.299,54.025 35.074,55.8 38.9,55.8 39.541,56.441 42.492,56.441 v1(42.5,56.45)
  Bottom Layer w0.2: v1(42.5,56.45) 45,53.95 J3.5
ADBUS5: IC3.29 J3.6 | length 15.6
  Top Layer w0.2: IC3.29 32.138,55.263 32.138,55.786 34.601,58.25 v1(42.5,58.25)
  Bottom Layer w0.2: v1(42.5,58.25) 42.55,58.25 43.9,56.9 45,55.8 J3.6
ADBUS6: IC3.30 J3.7 | length 16.4
  Top Layer w0.2: IC3.30 31.616,55.241 31.616,55.809 34.607,58.8 40.6,58.8 41.75,59.95 v1(42.5,59.95)
  Bottom Layer w0.2: v1(42.5,59.95) 43.23,59.95 J3.7
ADBUS7: IC3.31 J3.8 | length 17.5
  Top Layer w0.2: IC3.31 31.1,55.854 31.2,55.954 31.2,55.961 34.639,59.4 39.9,59.4 42.054,61.554 42.383,61.554 v1(42.478,61.65)
  Bottom Layer w0.2: v1(42.478,61.65) 44.45,61.65 44.6,61.5 44.6,61.472 45,61.072 J3.8
CC1: C102.2 D101.1 IC3.55 J1.A5 | length 32.1
  Top Layer w0.15: J1.A5 10.005,52.65 10.58,52.65 11.025,53.095 11.025,53.561 11.367,53.902 v1(11.367,54.032)
  Top Layer w0.2: v1(11.3,55.85) 11.25,55.9 11.25,58.95 C102.2 11.3,59.1 11.3,60.149 11.476,60.325 16.124,60.325 16.449,60 v1(16.5,60) ; v1(24.031,47.164) 24.027,47.168 24.027,48.151 24.401,48.525 IC3.55
  Bottom Layer w0.2: v1(11.3,55.85) 11.333,55.817 11.333,54.065 v1(11.367,54.032) ; v1(16.5,60) 24.11,52.39 24.11,47.243 v1(24.031,47.164)
CC2: C103.2 D102.2 IC3.52 J1.B5 | length 29.2
  Top Layer w0.2: D102.2@7.225,43.3 9.1,43.3 v1(10.4,44.6) ; D102.2@7.225,43.325 7.225,44.425 C103.2 7.2,44.6 7.2,47.5 7.2,50.45 7.693,50.943 7.943,50.943 J1.B5 ; v1(12,44.6) 19.3,44.6 20.6,45.9 20.6,46.8 23.825,50.025 IC3.52
  Bottom Layer w0.2: v1(10.4,44.6) v1(12,44.6)
EECLK: IC3.2 IC4.4 R308.2 | length 11.9
  Top Layer w0.2: IC4.4 25.75,35.9 25.9,36.05 R308.2@25.9,37.8 ; R308.2 26.05,38.15 26.05,47 26.1,47.05 IC3.2
EECS: IC3.1 IC4.5 R309.2 | length 15.6
  Top Layer w0.2: R309.2@23.25,34.4 R309.2@23.3,34.45 ; IC4.5 23.65,34.95 23.525,34.825 23.4,34.95 23.4,38.25 25.6,40.45 IC3.1
EEDATA: IC3.3 IC4.3 R306.2 | length 14.5
  Top Layer w0.2: IC3.3 26.55,47.275 26.55,46.725 26.5,46.675 26.5,40.4 28.4,38.5 28.4,36 IC4.3@28.3,35.9 ; IC4.3 IC4.3@28.3,35.9 ; R306.2@30.2,35.8 30.1,35.9 28.4,35.9 IC4.3@28.3,35.9
GND: C101.2 C102.1 C103.1 C201.1 C202.1 C203.1 C301.1 C302.1 C303.1 C304.1 C305.1 C306.1 C307.2 C308.1 C309.1 C310.1 C311.1 C312.1 C313.1 C314.1 C315.2 C316.2 C317.2 C318.1 C319.1 C320.1 C321.1 D101.2 D102.1 D201.2 D202.2 D203.2 D204.2 IC1.2 IC2.4 IC3.4 IC3.12 IC3.17 IC3.41 IC3.57 IC4.2 J1.A1 J1.A12 J1.B1 J1.B12 J5.1 J5.2 J7.2 J8.2 R205.1 R301.1 R313.1 S1.1 S1.3 S1.4 Y1.2 Y1.4 | length 50.2
  Top Layer w0.15: v1(10.375,60.175) 10.475,60.075 D101.2
  Top Layer w0.2: v1(6.3,43.3) D102.1 ; 8.95,49.05 8.95,49.515 v1(8.96,49.525) ; 8.95,54.525 8.95,54.11 v1(8.96,54.1) ; J1.A12 10.025,49.05 10.05,49.025 10.05,48.751 v1(10.234,48.566) ; J1.A1 10.025,54.55 10.218,54.743 10.218,54.91 v1(10.294,54.987) ; C101.2 v1(13.8,57.2) ; v1(19.9,17) 19.903,17.003 19.903,18.154 IC2.4 ; C202.1 v1(24.6,11.275) ; v1(25.958,56.104) 26.05,56.013 26.05,55.275 IC3.41 ; IC3.57@26.5,53.5 27.937,52.063 28.725,51.275 IC3.57 ; C312.1 v1(26.6,60.8) ; v1(27.1,46.376) IC3.4 ; v1(27.4,42) C308.1 ; IC3.57@27.838,50.4 27.975,50.4 28.788,51.213 IC3.57 ; IC3.57@28,53.5 28,52.125 IC3.57 ; C305.1 31.8,42.5 v1(31.8,41.8) ; D202.2 D202.2@31.823,24.573 ; C306.1 37.6,49.8 C306.1@37.65,49.85 ; C314.1 C314.1@40.5,47.6 ; S1.3 46.1,3.3
  Top Layer w0.3: v1(16.8,43.7) R313.1 ; v1(19.138,45.538) 19.138,45.647 19.3,45.808 19.3,45.95 19.55,46.2 C318.1 ; IC2.4 19.913,18.164 19.913,19.213 v1(19.922,19.222) ; IC3.57@26.1,54.025 IC3.41 ; IC3.4 IC3.57@27.1,49.525 ; IC3.12 31.1,49.025 33.855,49.025 v1(33.93,49.1) ; C311.1 v1(37.9,56.6)
  Top Layer w0.5: v1(5.2,44.5) C103.1 ; J7.2@8.999,34.209 J7.2 ; v1(9.074,58.974) 9.087,58.987 9.787,58.987 C102.1 ; D201.2 12.262,14.362 12.262,15.062 v1(12.3,15.1) ; v1(13.8,43) R301.1@13.8,43.85 ; v1(16.4,49.125) IC1.2 ; v1(18,34.2) D203.2 ; v1(19.9,15.2) 19.9,15.9 C203.1 C203.1@19.922,15.978 ; C201.1 20.005,25.695 20.706,25.695 v1(20.711,25.689) ; C307.2 v1(21.4,58.9) ; v1(22.623,58.976) 22.623,58.922 22.8,58.744 22.8,58.35 22.95,58.2 C302.1 ; C303.1 v1(25,43.4) ; R205.1@25,19.45 25.002,19.448 25.852,19.448 v1(25.854,19.446) ; v1(26.807,31.693) 26.804,31.696 26.804,32.496 C316.2 v1(26.8,33.554) v1(26.8,34.607) 27.093,34.9 27.95,34.9 IC4.2 28.05,34.9 v1(28.9,34.9) ; C301.1 30.262,60.262 30.262,60.862 v1(30.3,60.9) ; D202.2@31.823,24.573 v1(31.823,25.371) ; C309.1 v1(35.2,41.4) ; C310.1 34.562,42.738 35.162,42.738 v1(35.2,42.7) ; v1(40,6.4) C315.2 ; C314.1 v1(41.1,47.5) ; C317.2 v1(42,28.8)
  other v1: 39.5,15 36.8,15.1 40.1,29.2 26.7,36.2 36.1,36.45 29.1,37.6 34.8,37.75 33.448,38.95 34.5,42.1 21.65,43.4 23.3,43.4 10.5,43.7 12,43.7 38.2,44.7 37.6,45.3 23.3,45.7 35.895,45.852 31.89,46.01 23.3,46.6 12.3,48.3 37.4,50.5 42.5,50.5 18.975,50.825 34.425,51.025 37.4,52.2 42.5,52.2 12.369,52.767 11.6,53.1 42.51,53.9 12.2,54.2 22.5,55.1 42.5,55.6 12.2,55.8 14.9,55.8 22.2,58.2 42.5,59.1 31.3,60.8 42.5,60.8 16.625,60.85 42.5,62.5 24.7,63.2 30.6,64 42.4,64.2 41.301,65.499
  other v2: 2,2 6,2 10,2 14,2 18,2 22,2 26,2 30,2 38,2 8,6 12,6 16,6 20,6 24,6 28,6 36,6 44,6 48,6 52,6 2,10 46,10 50,10 4,14 8,14 48,14 2,18 6,18 50,18 4,22 8,22 52,22 2,26 6,26 50,26 4,30 52,30 2,34 6,34 4,38 52,38 2,42 50,42 52,46 2,50 50,50 4,54 52,54 2,58 50,58 4,62 8,62 52,62 2,66 6,66 10,66 14,66 14,66 16,70 24,70 28,70 32,70 36,70 40,70 44,70 48,70 52,70
GPIO0: IC3.7 J2.1 | length 27.8
  Top Layer w0.2: IC3.7 28.6,44.9 29.4,44.1 29.4,40.4 34,35.8 36.702,35.8 v1(36.714,35.812)
  Bottom Layer w0.2: v1(36.714,35.812) 40.133,35.812 43.875,32.069 43.875,32.034 44.534,31.375 44.569,31.375 44.885,31.059 44.885,30.075 J2.1
GPIO1: IC3.8 J2.2 | length 25.6
  Top Layer w0.2: IC3.8 29.1,45.227 29.9,44.427 29.9,40.7 33.5,37.1 v1(35.5,37.1)
  Bottom Layer w0.2: v1(35.5,37.1) 40.7,37.1 45,32.8 J2.2
GPIO2: IC3.9 J2.3 | length 23.7
  Top Layer w0.2: IC3.9 29.6,45.364 30.4,44.564 30.4,41.1 33.2,38.3 v1(34.1,38.3)
  Bottom Layer w0.2: v1(34.1,38.3) 34.177,38.377 34.507,38.377 34.531,38.4 41.64,38.4 J2.3
GPIO3: IC3.10 J2.4 | length 21.8
  Top Layer w0.2: IC3.10 30.1,45.6 30.9,44.8 30.9,41.65 32.9,39.65 v1(32.9,39.6)
  Bottom Layer w0.2: v1(32.9,39.6) 42.9,39.6 44.92,37.58 J2.4
NetC202_2: C202.2 JP1.2 L201.2 R204.1 | length 18.5
  Top Layer w0.5: R204.1@21.85,16.9 21.85,11.65 L201.2 21.5,9.75 22.25,9 24,9 24.4,9 25.9,9 28.6,11.7 JP1.2 JP1.2@28.54,14.24
NetC203_2: C203.2 IC2.3 | length 2.2
  Top Layer w0.5: C203.2 18.635,16.035 IC2.3
NetC306_2: C306.2 F3.2 IC3.18 | length 7.5
  Top Layer w0.2: C306.2 C306.2@36.033,49.567
  Top Layer w0.3: IC3.18 33.436,49.525 33.711,49.8 35.8,49.8 C306.2 ; C306.2@36.033,49.567 36.033,48.876 36.209,48.7 F3.2@38.9,48.7 ; F3.2@39,48.7 F3.2@39.3,49
NetC307_1: C307.1 F2.2 IC3.47 | length 9.2
  Top Layer w0.3: F2.2 20,57.6 20.8,56.8 C307.1 21.6,56.6 21.6,55 24.075,52.525 IC3.47
NetC314_2: C314.2 R302.2 Y1.3 | length 3.5
  Top Layer w0.2: R302.2 37.3,47.6 38.9,47.6 C314.2 Y1.3
NetC318_2: C318.2 F1.1 IC3.51 | length 9.9
  Top Layer w0.2: F1.1 F1.1@18.325,45.825
  Top Layer w0.3: C318.2 20.7,47.6 23.625,50.525 IC3.51
  Top Layer w0.5: F1.1@18,45.8 18,46.8 18.8,47.6 C318.2
NetC319_2: C319.2 IC3.53 R312.1 R313.2 | length 9.1
  Top Layer w0.3: C319.2 21.1,45 21.1,46.6 24.025,49.525 IC3.53
  Top Layer w0.5: R313.2 19.2,43.725 20.145,44.67 20.77,44.67 C319.2
NetD201_1: D201.1 D204.1 IC2.2 L201.1 | length 16.5
  Top Layer w0.5: D204.1 D201.1 17.1,11.3 17.2,11.4 L201.1 17.365,11.365 IC2.2
NetD202_1: D202.1 R206.2 | length 2.4
  Top Layer w0.5: R206.2@31.8,20.3 D202.1
NetD203_1: D203.1 R207.2 | length 3.2
  Top Layer w0.5: R207.2 14.825,36.825 D203.1@18,36.825
NetD304_2: D304.2 R314.2 | length 1.9
  Top Layer w0.2: D304.2@22,61.9 22,61.85 D304.2@22.05,61.8
  Top Layer w0.3: D304.2 22.425,61.525 23.275,61.525 R314.2
NetD305_1: D305.1 R315.1 | length 5.7
  Top Layer w0.5: R315.1@47.8,27.8 47.825,27.8 50.7,30.675 D305.1
NetD305_2: D305.2 R316.1 | length 4.1
  Top Layer w0.5: R316.1 47.825,17.2 50.7,14.325 D305.2
NetIC2_1: IC2.1 IC2.7 IC2.8 R201.1 R202.1 R203.1 | length 8.3
  Top Layer w0.5: IC2.1 15.194,18.156 14.5,18.85 14.5,18.95 14.5,20.7 14.5,22.45 14.5,22.55 14.6,22.65 14.7,22.65 15.75,23.7 16.7,23.7
NetIC2_5: IC2.5 R204.2 R205.2 | length 8.6
  Top Layer w0.5: IC2.5 19.922,23.727 19.922,23.028 23.3,19.65 23.4,19.65 23.5,19.55 23.5,19.45 R204.2@23.5,16.7
NetIC3_50: IC3.50 R301.2 | length 13.8
  Top Layer w0.2: R301.2 13.8,46.1 14.2,46.5 16.7,46.5 18.6,48.4 20.7,48.4 23.325,51.025 IC3.50
NetIC4_1: IC4.1 R306.1 R307.2 | length 4.2
  Top Layer w0.2: R307.2 28.2,32.5 28.2,33.85 28.05,34 IC4.1 28.2,34 30,34 R306.1@30.2,34.2
OSC_IN: C313.2 IC3.15 Y1.1 | length 7.2
  Top Layer w0.2: IC3.15 32.812,48.013 33.387,48.013 33.9,47.5 33.9,44.7 34.267,44.333 34.833,44.333 C313.2 ; C313.2@34.95,44.45 35.175,44.225 Y1.1@36.725,44.225
OSC_OUT: IC3.16 R302.1 | length 3.2
  Top Layer w0.2: IC3.16 32.825,48.5 34.4,48.5 34.942,47.958 35.492,47.958 R302.1@35.692,47.758
RESET: C315.1 IC3.6 R303.1 S1.2 | length 46.7
  Top Layer w0.2: IC3.6 28.15,47.275 28.15,44.65 28.9,43.9 28.9,40 37.6,31.3 v1(37.6,15.5) ; v1(38.9,14.3) 38.9,8.8 R303.1 C315.1 ; C315.1@40,8.7 40.1,8.6 S1.2@41.75,8.6
  Bottom Layer w0.2: v1(37.6,15.5) 37.65,15.5 38.85,14.3 v1(38.9,14.3)
RX_LED: D303.2 R311.2 | length 1.7
  Top Layer w0.5: R311.2 35.25,63.55 36.8,63.55 D303.2
TX_LED: D302.2 R310.2 | length 1.6
  Top Layer w0.5: R310.2 D302.2
USB_CONN_N: IC1.1 J1.A7 J1.B7 | length 8.2
  Top Layer w0.25: J1.B7 8.753,52.2 9.185,51.768 9.185,51.761 9.346,51.6 9.855,51.6 J1.A7
  Top Layer w0.35: J1.A7 12.118,51.55 12.122,51.546 12.468,51.2 15.275,51.2 15.48,50.995 15.48,50.155 IC1.1
USB_CONN_P: IC1.3 J1.A6 J1.B6 | length 11.2
  Top Layer w0.25: J1.B6 J1.B6@8.713,51.4
  Top Layer w0.35: J1.A6 10.997,52.05 12.325,52.05 12.675,51.7 15.8,51.7 16.45,51.05 16.835,51.05 17.225,50.66 17.225,50.25 IC1.3
  Bottom Layer w0.35: J1.B6 10.187,51.4 10.997,52.21 v1(10.997,52.253)
USB_N: IC1.6 IC3.48 | length 11.6
  Top Layer w0.35: IC1.6 15.45,52.925 15.775,53.25 15.775,53.36 17.04,54.625 19.157,54.625 21.757,52.025 IC3.48
USB_P: IC1.4 IC3.49 | length 10.5
  Top Layer w0.35: IC1.4 17.225,52.75 17.225,53.269 16.975,53.52 16.975,53.81 17.29,54.125 18.95,54.125 21.55,51.525 IC3.49
VBUS: C101.1 C201.2 IC1.5 IC2.6 J1.A4 J1.A9 J1.B4 J1.B9 J7.1 R201.2 R202.2 R203.2 R207.1 R312.2 | length 72.9
  Top Layer w0.2: J1.B4 8.75,50.55 J1.A9 ; J1.B9 8.725,53.025 9.472,53.025 9.88,53.025 J1.A4 9.93,53.075 10.474,53.075 10.65,53.251 10.65,54.331 11.076,54.757 11.175,54.757
  Top Layer w0.35: J1.A9 10.74,50.55 ; 11.09,50.2 11.1,50.2 ; IC1.5 16.525,52.5 16.525,51.975 16.825,51.675 v1(18.975,51.675)
  Top Layer w0.5: J7.1 11.25,36.75 ; 10.74,50.55 11.09,50.2 ; 11.1,50.2 11.25,50.05 11.25,49.1 ; 11.175,54.757 11.468,55.05 13.624,55.05 C101.1@13.674,55 ; v1(11.9,49.1) 11.25,49.1 ; R201.2@13,22.45 13,25.5 13.2,25.7 18.45,25.7 C201.2 18.618,25.682 18.618,23.761 IC2.6 ; 13,25.7 13,32.5 11.25,34.25 11.25,34.45 11.25,36.75 ; R207.1 13.15,36.75 11.25,36.75 ; C101.1@14,55.1 14,54.95 14.742,54.95 14.792,54.9 v1(14.846,54.9) ; R312.2 11.35,42.1 11.25,42.2 ; 11.25,36.75 11.25,42.2 ; 11.25,42.2 11.25,49.1
  Bottom Layer w0.5: v1(11.9,49.1) 14.6,49.1 17.2,51.7 ; v1(14.846,54.9) 14.851,54.895 14.851,54.049 17.2,51.7 ; v1(18.975,51.675) 17.225,51.675 17.2,51.7
VREGOUT: C301.2 C302.2 C303.2 C304.2 C305.2 C320.2 IC3.11 IC3.19 IC3.22 IC3.36 IC3.46 IC3.56 | length 65.6
  Top Layer w0.2: C303.2@24.4,45.041 C303.2@24.42,45.02
  Top Layer w0.3: C302.2@22.95,56.8 23,56.75 v1(23,55.9) 23,55.792 23.3,55.492 23.3,54.126 24.401,53.025 IC3.46 ; C303.2@24.1,44.8 24.1,45.6 24.9,46.4 IC3.56 ; C303.2 24.25,44.8 24.728,44.322 24.838,44.322 v1(24.915,44.246) ; IC3.36 28.6,56.7 30.1,58.2 30.1,58.7 C301.2 30.324,58.924 30.924,58.924 31.223,59.223 v1(31.223,59.923) ; IC3.11 30.6,46.173 v1(31.75,45.023) C305.2 ; IC3.19 33.289,50.025 33.339,50.075 33.349,50.075 33.624,50.35 35.65,50.35 36,50.7 C304.2 36,52.15 ; IC3.22 33.925,51.525 35.2,52.8 35.9,52.8 C320.2 36,52.15 ; v1@35.15,51.85 35.45,52.15 36,52.15
  Bottom Layer w0.3: v1(23,55.9) 23.877,56.777 31.223,56.777 ; v1(24.915,44.246) 24.938,44.223 31.023,44.223 31.75,44.95 v1(31.75,45.023) 31.823,45.023 36.2,49.4 36.2,51.477 36.188,51.488 ; v1(31.223,59.923) 31.223,56.777 ; v1(35.101,51.601) 35.196,51.506 35.751,51.506 35.769,51.488 36.188,51.488 ; 31.223,56.777 36.178,51.822 36.178,51.498 36.188,51.488
pads on no net: IC3.20 IC3.21 IC3.45 J1. J1.A2 J1.A3 J1.A8 J1.A10 J1.A11 J1.B2 J1.B3 J1.B8 J1.B10 J1.B11 J1.SH1 J1.SH3 J1.SH4 J8.MH1 J8.MH2

## Polygon pours and split planes (outlines as drawn)
GND on Mid-Layer 2 "Top Layer GND polygon" (solid, pour order 1): 0,72 0,0 54,0 54,72
GND on Mid-Layer 1 "Top Layer GND polygon" (solid, pour order 0): 0,72 0,0 54,0 54,72
GND on Top Layer "Top Layer GND polygon" (solid, pour order 3): 0,72 0,0 54,0 54,72
GND on Bottom Layer "Top Layer GND polygon" (solid, pour order 4): 0,72 0,0 54,0 54,72

## Other copper
Top Layer:
  region net GND: 20.9,58.6 20.9,57.8 23.5,57.8 23.5,58.6
  region net GND: 39.575,43.625 38.675,43.625 36.625,45.675 37.275,46.325 38.925,44.675 39.575,44.675
  region net GND: 34.45,45.35 37.35,45.35 37.35,46.35 34.45,46.35
  pour cut-out: 22,54 14,54 14,59 21.723,59 21.723,53.976
  region net GND: 20.6,43.8 20.6,43 24.6,43 24.6,43.8
  region net GND: 19.5,18.9 19.5,15.5 20.4,15.5 20.4,18.9
  region net NetC319_2: 18.7,41.6 19.7,41.6 19.7,44.2 18.7,44.2
  region net GND: 37,53.3 37,49.2 37.8,49.2 37.8,53.3
  region net GND: 10.35,54.375 8.7,54.375 8.375,54.725 8.375,54.75 8.5,55 8.74,55.16 9.175,54.725 10.35,54.725
  region net GND: 10.35,49.225 8.65,49.225 8.4,48.975 8.5,48.512 8.812,48.512 9.3,48.875 10.35,48.875
  region net GND: 34.1,43.25 34.9,43.25 34.9,40.95 34.1,40.95
  region net 3.45V: 38.2,67.4 38.2,62.92 39.4,62.92 39.4,67.4
  region net 3.45V: 32.7,43.2 32.7,41 33.5,41 33.5,43.2
  region net 3.45V: 31.45,47.75 31.45,46.9 32.25,46.9 32.25,47.75
  region net VBUS: 13.5,22.95 12.5,22.95 12.5,18.45 13.5,18.45
  region net NetIC2_1: 17.5,24.45 16,24.45 16,22.95 17.5,22.95

## Silkscreen, mask and mechanical layers (free items; w line width, h text height)
Top Overlay:
  drawing of 5 lines, arcs and shapes, not listed
  text "AC/DBUS" at 40.7,70 h1.2
  text "8" at 13.8,69.8 h1.2
  text "7" at 16.6,69.8 h1.2
  text "6" at 18.9,69.8 h1.2
  text "5" at 21.5,69.8 h1.2
  text "C2" at 41.1,67.7 h1.2
  text "ACBUS" at 6.7,67.4 h1.2
  text "TX" at 36.7,66.9 h1.2
  text "C1" at 46.5,65 h1.2
  text "Sleep" at 14.8,63.2 h1.2
  text "C0" at 46.5,62.4 h1.2
  text "RX" at 36.6,60.9 h1.3
  text "D7" at 46.5,59.9 h1.2
  text "D6" at 46.5,57.4 h1.2
  text "D5" at 46.5,54.8 h1.2
  text "D4" at 46.5,52.3 h1.2
  text "D3" at 46.5,49.8 h1.2
  text "D2" at 46.5,47.2 h1.2
  text "D1" at 46.5,44.7 h1.2
  text "D0" at 46.5,42.1 h1.2
  text "GPIO" at 42.675,39.425 h1.2
  text "VBUS" at 15.675,37.575 h1.2
  text "3" at 46.7,36.8 h1.2
  text "USB V+" at 0.3,36 h1.2
  text "2" at 46.7,34.3 h1.2
  text "GND" at 3.7,33.3 h1.2
  text "1" at 46.9,31.8 h1.2
  text "0" at 46.7,29.2 h1.2
  text "+Vc" at 43.3,26.4 h1.2
  text "DC/DC ON" at 27.634,26.072 h1.2
  text "GND" at 43.4,18.5 h1.2
  text "Reset" at 40.95,10 h1.2
  text "ZRiR IRiTM / 03/2022" at 13.1,0.9 h1.52
  text "-" at 32.3,0.6 h2
  text "+" at 29.7,0.3 h2
Mechanical 1:
  lines w0.2: 0,0 54,0 54,18.075 54,54.025 54,72 0,72 0,0
  text ".Pcb_File_Name_No_Path" at 0,-2.5 h0.7
Board Outline:
  lines w0.2: 1417.969,-1315.972 cw(c1992.806,-1890.806) 1417.971,-1315.97 ; 0,0 0,72 54,72 54,0 0,0